# Altium PCB sem_8700.PcbDoc
Units mm, origin at the board's own origin, x right, y up, seen from the top; angles counter-clockwise.
Board outline 86 x 68 mm, 2 copper layers (Top, Bottom); 97 components, 80 nets, 338 pads, 30 vias.
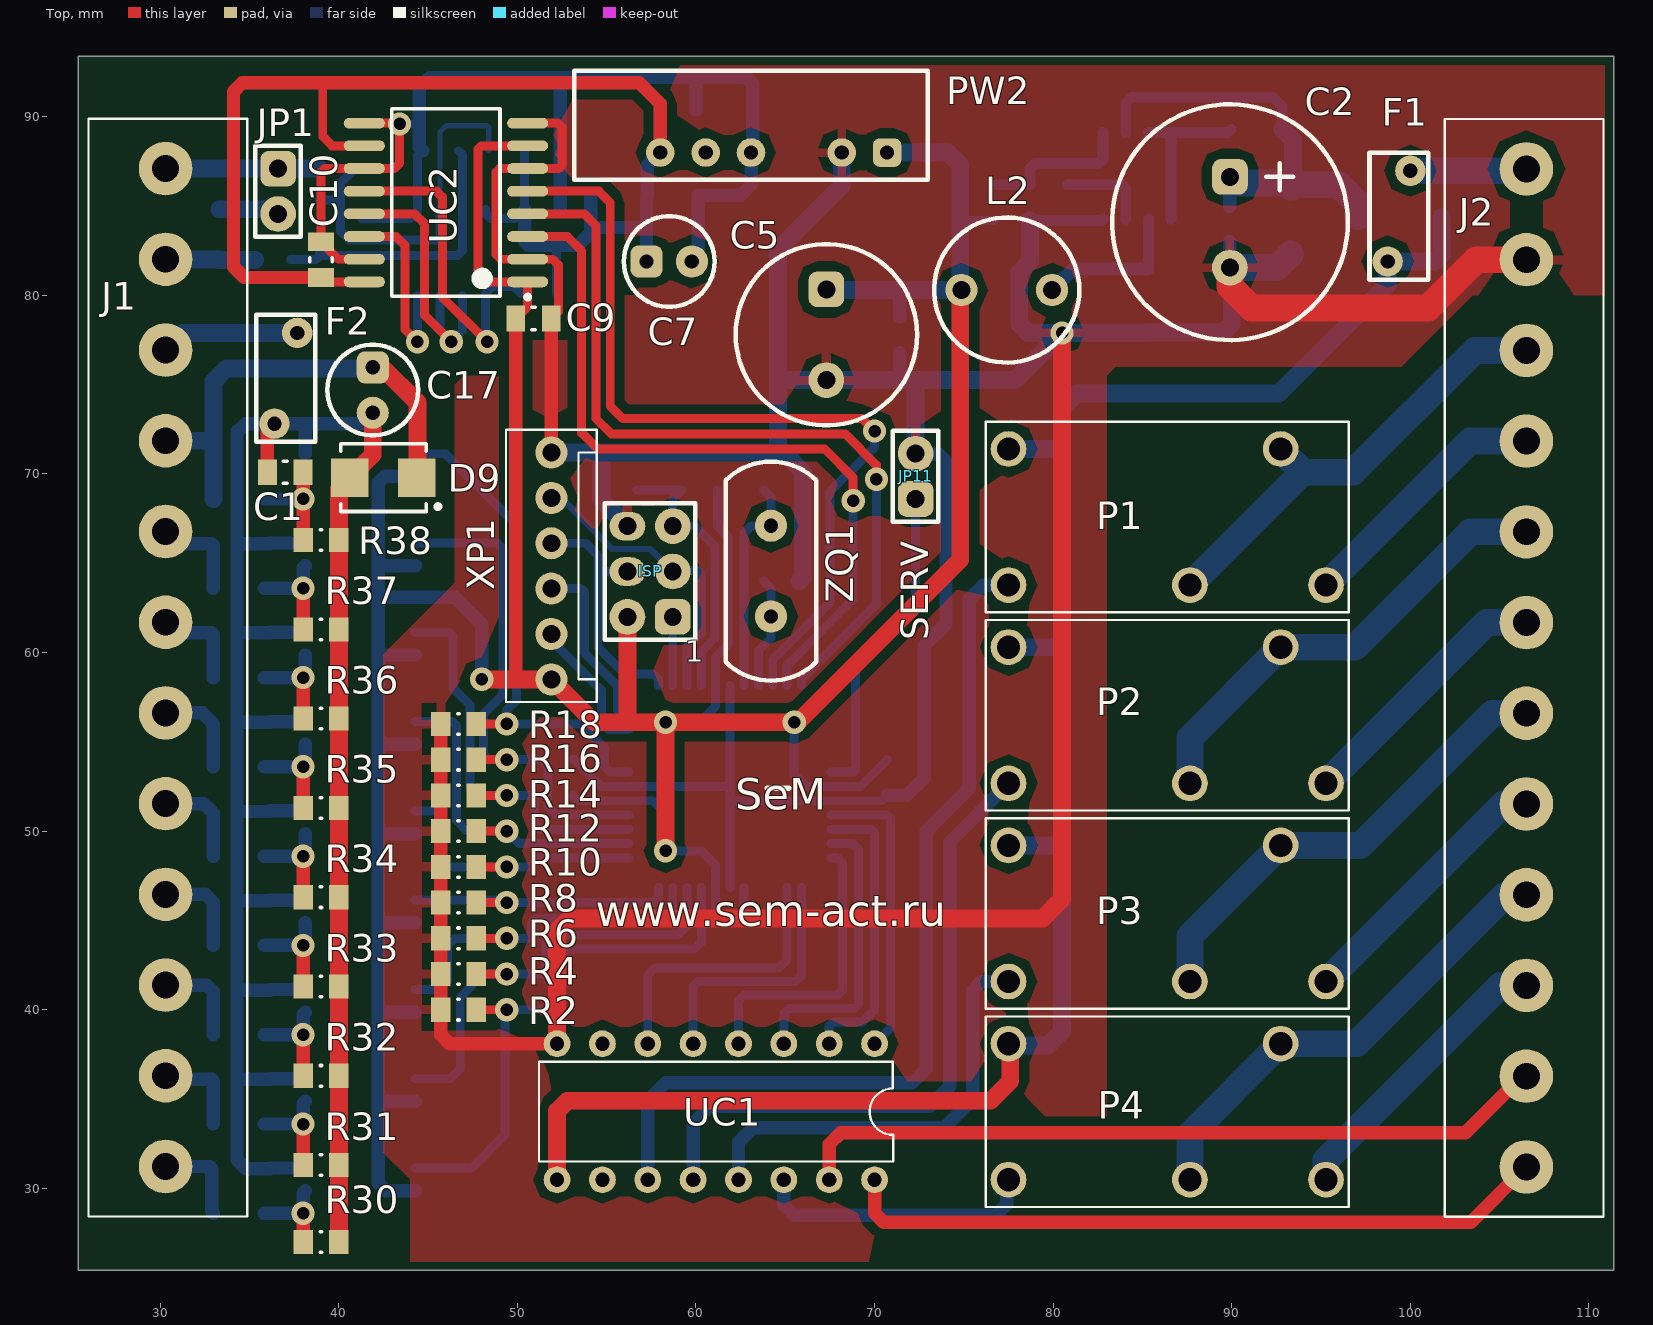
[diagram p0: Top view]
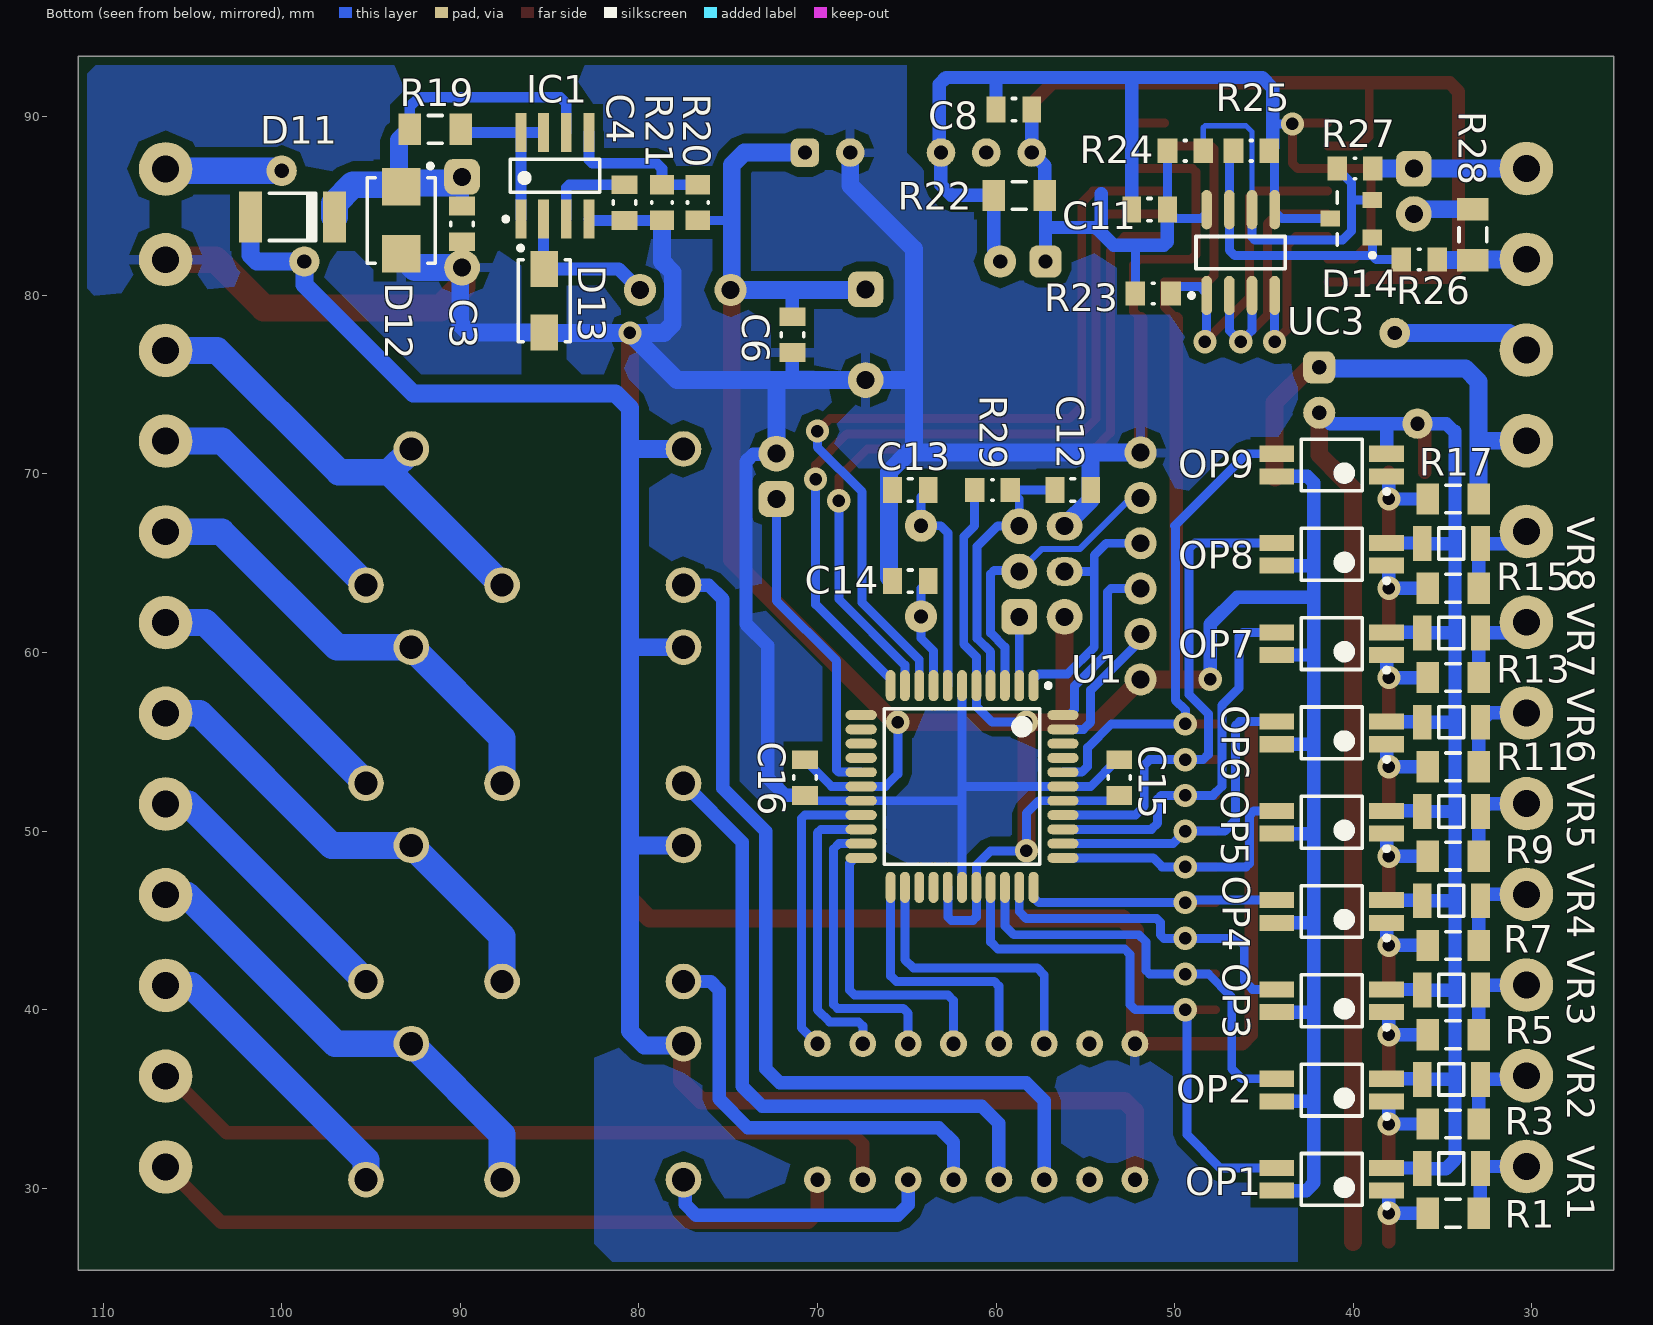
[diagram p1: Bottom view, seen from below]

## Layer stack, top to bottom
Top Solder: solder mask 0.0102, Solder Resist, Dk 3.5
Top: signal copper 0.0356
Dielectric 1: dielectric 0.32, FR-4, Dk 4.8
Bottom: signal copper 0.0356
Bottom Solder: solder mask 0.0102, Solder Resist, Dk 3.5

## Board outline
25.4,25.4 111.4,25.4 111.4,93.4 25.4,93.4

## Design rules (kind name [scope] priority, off if disabled: settings)
Clearance [All] p1: gap=0.3
PlaneConnect [All] p1: planeconnectstyle=Relief reliefexpansion=0.508 reliefentries=4 reliefconductorwidth=0.5 reliefairgap=0.5
PolygonConnect [All] p1: connectstyle=Relief reliefconductorwidth=0.5 reliefentries=4 polygonreliefangle="90 Angle" airgapwidth=0.5
RoutingVias [All] p1: holewidth=0.711 width=1.27 viastyle="Through Hole" minholewidth=0.711 minwidth=1.27 maxholewidth=0.711 maxwidth=1.27
SolderMaskExpansion [All] p1: expansion=0.102
Width [All] p1: maxlimit=1.5 minlimit=0.254 preferedwidth=0.254
28 further rules are at their usual default settings.

## Components (designator, comment, footprint, x,y, rotation, side; value= is the part's Value field where it differs from the comment)
C1 "0.1" CAPC2113X13N_0805 37,70.1 r180 top
C2 "470.0x50V" Cap_pol_13x25 89.9,84.1 r270 top
C3 "0.1" CAPC2113X13N_0805 89.9,84 r270 bottom
C4 "470 pF" CAPC2113X13N_0805 80.8,85.2 r270 bottom
C5 "470.0x35V" Cap_2(10x12.5) 67.3,77.8 r270 top
C6 "0.1" CAPC2113X13N_0805 71.4,77.8 r270 bottom
C7 "22.0x16V" Cap_4(5x10) 58.5,81.9 r0 top
C8 "0.1" CAPC2113X13N_0805 59,90.4 r0 bottom
C9 "0.1" CAPC2113X13N_0805 50.9,78.7 r0 top
C10 "0.1" CAPC2113X13N_0805 39,82 r90 top
C11 "0.1" CAPC2113X13N_0805 51.4,84.8 r180 bottom
C12 "0.1" CAPC2113X13N_0805 55.7,69.1 r180 bottom
C13 "22p" CAPC2113X13N_0805 64.8,69.1 r0 bottom
C14 "22p" CAPC2113X13N_0805 64.8,64 r0 bottom
C15 "0.1" CAPC2113X13N_0805 53.1,53 r90 bottom
C16 "0.1" CAPC2113X13N_0805 70.7,53 r270 bottom
C17 "47.0x35V" Cap_4(5x10) 41.9,74.7 r270 top
D9 "SMDJ36CA" SMB_1 42.5,69.8 r180 top
D11 "SM4007" DIOD_SM1 99.4,84.4 r180 bottom
D12 "SMDJ36CA" SMB_1 93.3,84.2 r270 bottom
D13 "SS18" DIOD_SMA 85.3,79.7 r90 bottom
D14 "ESDA6V1L" SOT23_diod_ESDA 40.1,84.3 r0 bottom
F1 "500mA" Fuse_termo 100,81.9 r90 top
F2 "500mA" Fuse_termo 36.4,77.9 r270 top
IC1 "MC34063" SOIC_SO-8 84.7,86.7 r90 bottom
ISP "ISP" ISP_1 58.7,62 r90 top
J1 "Conn_12x1" conn12_2 30.3,87.1 r0 top
J2 "Conn_12x1" conn12_2 106.5,31.2 r180 top
JP1 "jamper" JP_2_2.5 36.6,87.1 r270 top
JP11 "jamper" JP_2_2.5 72.3,68.6 r90 top
L2 "220mH" Dr_1 77.4,80.3 r180 top
OP1 "TLP281GB" SOIC127_TPL 41.2,30.5 r0 bottom
OP2 "TLP281GB" SOIC127_TPL 41.2,35.5 r0 bottom
OP3 "TLP281GB" SOIC127_TPL 41.2,40.5 r0 bottom
OP4 "TLP281GB" SOIC127_TPL 41.2,45.5 r0 bottom
OP5 "TLP281GB" SOIC127_TPL 41.2,50.5 r0 bottom
OP6 "TLP281GB" SOIC127_TPL 41.2,55.5 r0 bottom
OP7 "TLP281GB" SOIC127_TPL 41.2,60.5 r0 bottom
OP8 "TLP281GB" SOIC127_TPL 41.2,65.5 r0 bottom
OP9 "TLP281GB" SOIC127_TPL 41.2,70.5 r0 bottom
P1 "TRJ" PCB_RELE_TRJ1 77.5,71.4 r0 top
P2 "TRJ" PCB_RELE_TRJ1 77.5,60.3 r0 top
P3 "TRJ" PCB_RELE_TRJ1 77.5,49.2 r0 top
P4 "TRJ" PCB_RELE_TRJ1 77.5,38.1 r0 top
PW2 "TMA_0505" TMA_1W_new 70.7,88 r180 top
R1 "4k7" RES_1206 34.4,28.6 r0 bottom
R2 "4k7" RESC2113X0805N 46.7,40 r180 top
R3 "4k7" RES_1206 34.4,33.6 r0 bottom
R4 "4k7" RESC2113X0805N 46.7,42 r180 top
R5 "4k7" RES_1206 34.4,38.6 r0 bottom
R6 "4k7" RESC2113X0805N 46.7,44 r180 top
R7 "4k7" RES_1206 34.4,43.6 r0 bottom
R8 "4k7" RESC2113X0805N 46.7,46 r180 top
R9 "4k7" RES_1206 34.4,48.6 r0 bottom
R10 "4k7" RESC2113X0805N 46.7,48 r180 top
R11 "4k7" RES_1206 34.4,53.6 r0 bottom
R12 "4k7" RESC2113X0805N 46.7,50 r180 top
R13 "4k7" RES_1206 34.4,58.6 r0 bottom
R14 "4k7" RESC2113X0805N 46.7,52 r180 top
R15 "4k7" RES_1206 34.4,63.6 r0 bottom
R16 "4k7" RESC2113X0805N 46.7,54 r180 top
R17 "4k7" RES_1206 34.4,68.6 r0 bottom
R18 "4k7" RESC2113X0805N 46.7,56 r180 top
R19 "1 Om" RES_1206 91.4,89.3 r0 bottom
R20 "3k6" RESC2113X0805N 76.7,85.2 r270 bottom
R21 "1k2" RESC2113X0805N 78.7,85.2 r90 bottom
R22 "470 Om" RES_1206 58.7,85.6 r0 bottom
R23 "10k" RESC2113X0805N 51.2,80.1 r180 bottom
R24 "4k7" RESC2113X0805N 49.4,88.1 r0 bottom
R25 "4k7" RESC2113X0805N 45.7,88.1 r180 bottom
R26 "10 Om" RESC2113X0805N 36.3,82 r0 bottom
R27 "10 Om" RESC2113X0805N 39.9,87.1 r0 bottom
R28 "120 Om" RES_1206 33.3,83.4 r90 bottom
R29 "47k" RESC2113X0805N 60.2,69.1 r0 bottom
R30 "1k" RESC2113X0805N 39,27 r180 top
R31 "1k" RESC2113X0805N 39,31.3 r180 top
R32 "1k" RESC2113X0805N 39,36.3 r180 top
R33 "1k" RESC2113X0805N 39,41.3 r180 top
R34 "1k" RESC2113X0805N 39,46.3 r180 top
R35 "1k" RESC2113X0805N 39,51.3 r180 top
R36 "1k" RESC2113X0805N 39,56.3 r180 top
R37 "1k" RESC2113X0805N 39,61.3 r180 top
R38 "1k" RESC2113X0805N 39,66.3 r180 top
U1 "ATmega164PA-AU" 44A_N 61.9,52.5 r270 bottom
UC1 "ULN2003A" PDIP16_1 70,38.1 r180 top
UC2 "ADUM1301" SOIC127P1030X265-16N_SOIC_W 46,85.2 r180 top
UC3 "ADM1485" SOIC127P600X175-8N_SOIC_SO8 46.3,82.4 r90 bottom
VR1 "CN1206K25G" var1206 34.5,31.1 r180 bottom
VR2 "CN1206K25G" var1206 34.5,36.1 r180 bottom
VR3 "CN1206K25G" var1206 34.5,41.1 r180 bottom
VR4 "CN1206K25G" var1206 34.5,46.1 r180 bottom
VR5 "CN1206K25G" var1206 34.5,51.1 r180 bottom
VR6 "CN1206K25G" var1206 34.5,56.1 r180 bottom
VR7 "CN1206K25G" var1206 34.5,61.1 r180 bottom
VR8 "CN1206K25G" var1206 34.5,66.1 r180 bottom
XP1 "XP6x1" CONN_WF-6 51.9,71.2 r180 top
ZQ1 "14.7456" ZQ_1 64.2,67.1 r270 top

## Footprints (in the part's own frame and the unit in brackets; to place one, negate y for a bottom-side part, rotate by r counter-clockwise, add the part's x,y. Pads: shape width x height; smd on the part's side, far side on the other; paste and mask are expansions set on the pad)
44A_N [mm] "Thin QFP, 44-Leads, Body 10x10mm, Pitch 0.8mm, IPC Medium Density"
  oval 1.75x0.55 smd: 1(-5.65,4) 2(-5.65,3.2) 3(-5.65,2.4) 4(-5.65,1.6) 5(-5.65,0.8) 6(-5.65,0) 7(-5.65,-0.8) 8(-5.65,-1.6) 9(-5.65,-2.4) 10(-5.65,-3.2) 11(-5.65,-4) 23(5.65,-4) 24(5.65,-3.2) 25(5.65,-2.4) 26(5.65,-1.6) 27(5.65,-0.8) 28(5.65,0) 29(5.65,0.8) 30(5.65,1.6) 31(5.65,2.4) 32(5.65,3.2) 33(5.65,4)
  oval 0.55x1.75 smd: 12(-4,-5.65) 13(-3.2,-5.65) 14(-2.4,-5.65) 15(-1.6,-5.65) 16(-0.8,-5.65) 17(0,-5.65) 18(0.8,-5.65) 19(1.6,-5.65) 20(2.4,-5.65) 21(3.2,-5.65) 22(4,-5.65) 34(4,5.65) 35(3.2,5.65) 36(2.4,5.65) 37(1.6,5.65) 38(0.8,5.65) 39(0,5.65) 40(-0.8,5.65) 41(-1.6,5.65) 42(-2.4,5.65) 43(-3.2,5.65) 44(-4,5.65)
  silkscreen extent -5.77,-4.35 4.35,4.95, body extent -5,-5 5,5, height 1.2
Cap_2(10x12.5) [mm]
  rrect50% 2x2 hole 1: 1(-2.54,0)
  round 2 hole 1: 2(2.54,0)
  silkscreen extent -5.08,-5.08 5.08,5.08, body extent -4.84,-4.84 4.84,4.84, height 12.5
Cap_4(5x10) [mm]
  rrect50% 1.8x1.8 hole 0.8: 1(-1.27,0)
  round 1.8 hole 0.8: 2(1.27,0)
  silkscreen extent -2.54,-2.54 2.54,2.54, body extent -2.31,-2.31 2.31,2.31, height 10
Cap_pol_13x25 [mm]
  rrect50% 2x2 hole 1: 1(-2.54,0)
  round 2 hole 1: 2(2.54,0)
  silkscreen extent -6.6,-6.6 6.6,6.6, body extent -6.61,-6.61 6.61,6.61, height 21
CAPC2113X13N_0805 [mm] "Chip Capacitor, 2-Leads, Body 2.10x1.30mm, IPC Medium Density"
  rect 1.05x1.45 smd: 1(-1,0) 2(1,0)
  silkscreen extent -0.1,-0.63 0.1,0.63, body extent -1.1,-0.7 1.1,0.7, height 1.3
conn12_2 [mm]
  round 3 hole 1.5: 1(0,0) 2(0,-5.08) 3(0,-10.16) 4(0,-15.24) 5(0,-20.32) 6(0,-25.4) 7(0,-30.48) 8(0,-35.56) 9(0,-40.64) 10(0,-45.72) 11(0,-50.8) 12(0,-55.88)
  silkscreen extent -4.32,-58.67 4.57,2.79
CONN_WF-6 [mm]
  round 1.8 hole 1: 1(0,0) 2(0,2.54) 3(0,5.08) 4(0,7.62) 5(0,10.16) 6(0,12.7)
  silkscreen extent -2.54,-1.27 2.54,13.97
DIOD_SM1 [mm]
  rect 1.3x2.85 smd: 1(-2.35,0) 2(2.35,0)
  silkscreen extent -1.3,-1.32 1.3,1.33, body extent -2.6,-1.35 2.6,1.34, height 2.69
DIOD_SMA [mm]
  rect 2x1.55 smd: 1(-1.778,0) 2(1.778,0)
  silkscreen extent -2.3,-1.45 3.07,1.45, body extent -2.3,-1.45 2.3,1.45, height 2.44
Dr_1 [mm]
  round 1.8 hole 1: 1(-2.54,0) 2(2.54,0)
  silkscreen extent -4.06,-4.06 4.06,4.06
Fuse_termo [mm]
  round 1.7 hole 0.8: 1(0,1.27) 2(5.08,0)
  silkscreen extent -1.02,-1.02 6.1,2.29
ISP_1 [mm]
  rrect50% 2x2 hole 1: 1(0,0)
  round 2 hole 1: 2(0,2.54) 3(2.54,0) 5(5.08,0)
  oval 1.6x2 hole 1: 4(2.54,2.54) 6(5.08,2.54)
  silkscreen extent -1.27,-1.27 6.35,3.81
JP_2_2.5 [mm]
  rrect50% 2x2 hole 1: 1(0,0)
  round 2 hole 1: 2(2.54,0)
  silkscreen extent -1.27,-1.27 3.81,1.27
PCB_RELE_TRJ1 [mm]
  round 2 hole 1.3: 1(0,-7.62) 2(10.16,-7.62) 3(17.78,-7.62) 4(15.24,0) 5(0,0)
  silkscreen extent -1.27,-9.14 19.05,1.52
PDIP16_1 [mm]
  round 1.5 hole 0.8: 1(0,0) 2(2.54,0) 3(5.08,0) 4(7.62,0) 5(10.16,0) 6(12.7,0) 7(15.24,0) 8(17.78,0) 9(17.78,7.62) 10(15.24,7.62) 11(12.7,7.62) 12(10.16,7.62) 13(7.62,7.62) 14(5.08,7.62) 15(2.54,7.62) 16(0,7.62)
  silkscreen extent -1.04,1.02 18.8,6.6
RES_1206 [mm] "Chip Resistor, 2-Leads, Body 3.10x1.60mm, IPC Medium Density"
  rect 1.25x1.75 smd: 1(-1.425,0) 2(1.425,0)
  silkscreen extent -0.4,-0.77 0.4,0.77, body extent -1.6,-0.85 1.6,0.85, height 0.55
RESC2113X0805N [mm] "Chip Resistor, 2-Leads, Body 2.10x1.30mm, IPC Medium Density"
  rect 1.1x1.35 smd: 1(-1,0) 2(1,0)
  silkscreen extent -0.05,-0.58 0.05,0.58, body extent -1.1,-0.7 1.1,0.7, height 0.5
SMB_1 [mm]
  rect 2.1x2.15 smd: 1(-1.875,0) 2(1.875,0)
  silkscreen extent -3.18,-1.9 2.4,1.9, body extent -2.4,-1.9 2.4,1.9, height 2.4
SOIC127_TPL [mm] "SOIC, 4-Leads, Body 2.60x4.45mm, Pitch 1.27mm, IPC Medium Density"
  rect 1.95x0.9 smd: 1(-3.075,0.635) 2(-3.075,-0.635) 3(3.075,-0.635) 4(3.075,0.635)
  silkscreen extent -3.2,-1.45 1.7,1.61, body extent -2.35,-1.45 2.35,1.45, height 2.1
SOIC127P600X175-8N_SOIC_SO8 [mm] "SOIC, 8-Leads, Body 4.90x3.90mm, Pitch 1.27mm, IPC Medium Density"
  oval 2.2x0.6 smd: 1(-2.4,1.905) 2(-2.4,0.635) 3(-2.4,-0.635) 4(-2.4,-1.905) 5(2.4,-1.905) 6(2.4,-0.635) 7(2.4,0.635) 8(2.4,1.905)
  silkscreen extent -2.52,-2.5 0.9,2.88, body extent -2,-2.5 2,2.5, height 1.75
SOIC127P1030X265-16N_SOIC_W [mm] "SOIC, 16-Leads, Body 10.30x7.50mm, Pitch 1.27mm, IPC Medium Density"
  oval 2.3x0.6 smd: 1(-4.575,4.445) 2(-4.575,3.175) 3(-4.575,1.905) 4(-4.575,0.635) 5(-4.575,-0.635) 6(-4.575,-1.905) 7(-4.575,-3.175) 8(-4.575,-4.445) 9(4.575,-4.445) 10(4.575,-3.175) 11(4.575,-1.905) 12(4.575,-0.635) 13(4.575,0.635) 14(4.575,1.905) 15(4.575,3.175) 16(4.575,4.445)
  silkscreen extent -4.7,-5.25 3.03,5.42, body extent -3.8,-5.25 3.8,5.25, height 2.65
SOIC_SO-8 [mm]
  rect 2.2x0.6 smd: 1(-2.425,1.905) 2(-2.425,0.635) 3(-2.425,-0.635) 4(-2.425,-1.905) 5(2.425,-1.905) 6(2.425,-0.635) 7(2.425,0.635) 8(2.425,1.905)
  silkscreen extent -2.55,-2.5 0.93,2.88, body extent -2,-2.5 2,2.5, height 1.75
SOT23_diod_ESDA [mm]
  rect 1.1x0.9 smd: 1(-1.175,1.05) 2(-1.175,-1.05) 3(1.175,0)
  silkscreen extent -1.3,-1.5 0.8,2.17, body extent -0.8,-1.52 0.8,1.52, height 1.4
TMA_1W_new [mm]
  rrect50% 1.6x1.6 hole 0.8: 1(0,0)
  round 1.6 hole 0.8: 2(2.54,0) 3(7.62,0) 4(10.16,0) 5(12.7,0)
  silkscreen extent -2.29,-4.57 17.53,1.52, body extent -2.13,-4.59 17.37,1.53, height 10.2
var1206 [mm]
  rect 1.05x1.95 smd: 1(-1.625,0) 2(1.625,0)
  silkscreen extent -0.7,-0.87 0.7,0.87, body extent -1.75,-0.85 1.75,0.85, height 1.69
ZQ_1 [mm]
  round 1.8 hole 0.8: 1(0,0) 2(5.08,0)
  silkscreen extent -3.59,-2.54 8.67,2.54

## Part data
C1 C3 C4 C6 C8 C9 C10 C11 C12 C13 C14 C15 C16: library part cap_1
C2: library part Cap_pol1
C5 C7 C17: library part Cap_pol2
D9 D12: library part Diodes_SMB
D11: library part Diodes_4007
D13: library part Diod_30BQ100
D14: library part Diod_ESDA
F1 F2: library part Fuse_term
IC1: library part MC34063_1
ISP: library part ISP_1
JP1 JP11: library part JP_2x2.5
L2: library part Dr_1
OP1 OP2 OP3 OP4 OP5 OP6 OP7 OP8 OP9: library part opto_TLP
P1 P2 P3 P4: library part Rele_TRJ
PW2: library part TRACO_PW1
R1 R2 R3 R4 R5 R6 R7 R8 R9 R10 R11 R12 R13 R14 R15 R16 R17 R18 R19 R20 R21 R22 R23 R24 R25 R26 R27 R28 R29 R30 R31 R32 R33 R34 R35 R36 R37 R38: library part rez_1
U1: "8-bit AVR Microcontroller, 16KB Flash, 512 Bytes EEPROM, 1KB SRAM, 44-pin TQFP, Industrial Grade (-40°C to 85°C)"
UC3: library part ADM485
VR1 VR2 VR3 VR4 VR5 VR6 VR7 VR8: library part var_smd1
XP1: library part Connect6_1
ZQ1: library part ZQ_1

## Via types
v1: diameter 1.3, hole 0.7, Top to Bottom, tented both sides, 30 vias

## Nets (pads, with @x,y where several pads share a name; then routed paths per layer and width w, separated by ;. In a path a pad name is that pad's centre, name@x,y a point inside that pad or via, vN(x,y) a via of type N, cw(c..) or ccw(c..) an arc to the next point about the centre after c; other vN are vias at no path point)
+5V: C5.1 C6.1 C9.1 C15.1 C16.1 ISP.2 L2.2 OP1.4 OP2.4 OP3.4 OP4.4 OP5.4 OP6.4 OP7.4 OP8.4 OP9.4 PW2.1 R20.2 R29.2 U1.5 U1.17 U1.27 U1.29 U1.38 UC2.1 UC2.7 XP1.6 | length 227.6
  Top w0.5: 49.9,58.6 50,58.5 ; C9.1 50.575,79.375 UC2.1 48.145,80.755 47.8,81.1 47.8,88.2 47.975,88.375 UC2.7
  Top w0.75: 49.9,58.6 C9.1
  Top w1: v1(48,58.5) 50,58.5 XP1.6 54.3,56.1 56.2,56.1 ; ISP.2 56.16,56.14 56.2,56.1 ; v1(58.3,48.9) v1(58.3,56.1) ; L2.2 74.8,80.24 74.8,65.2 65.7,56.1 v1(65.5,56.1) v1(58.3,56.1) ; 56.2,56.1 v1(58.3,56.1)
  Bottom w0.5: C15.1 53.4,51.7 U1.38 57.6,51.7 58.3,51 v1(58.3,48.9) 60.3,48.9 61.1,48.1 U1.29 61.1,45.2 61.3,45 62.5,45 62.7,45.2 U1.27 U1.27@62.721,46.829 ; v1(58.3,56.1) 60.2,56.1 61.1,57 U1.5 61.1,59.767 61.808,60.475 61.808,66.492 61.2,67.1 R29.2 ; v1(65.5,56.1) 65.5,53.2 66.2,52.5 U1.17 69.2,52.5 C16.1 ; 74.8,84.2 R20.2
  Bottom w0.75: OP1.4 42.635,29.865 42.2,30.3 42.2,34.9 ; OP2.4 42.235,34.865 42.2,34.9 ; OP3.4 42.335,39.865 42.2,40 ; OP4.4 42.265,44.865 42.2,44.8 ; OP5.4 42.265,49.865 42.2,49.8 ; OP6.4 42.265,54.865 42.2,54.8 ; OP7.4 42.265,59.865 42.2,59.8 ; OP8.4 42.265,64.865 42.2,64.8 ; OP9.4 42.565,69.865 42.2,69.5 42.2,64.8 ; v1(48,58.5) 48,61.6 46.5,63.1 42.2,63.1 ; C6.1 71.4,80.3 ; 42.2,34.9 42.2,40 ; 42.2,40 42.2,44.8 ; 42.2,44.8 42.2,49.8 ; 42.2,49.8 42.2,54.8 ; 42.2,54.8 42.2,59.8 ; 42.2,59.8 42.2,63.1 ; 42.2,63.1 42.2,64.8
  Bottom w1: C5.1 67.34,80.3 71.4,80.3 L2.2 74.8,80.36 74.8,84.2 74.8,87.3 74.1,88 PW2.1
+5V_I: C7.1 C8.1 C10.1 C11.2 PW2.5 R22.1 R23.1 R24.2 UC2.10 UC2.16 UC3.8 | length 79.3
  Top w0.5: C10.1 39.245,80.755 UC2.16 ; 39.2,91.9 39.1,91.8 39.1,88.9 39.625,88.375 UC2.10
  Top w0.75: C10.1 34.7,81 34.1,81.6 34.1,91.4 34.6,91.9 39.2,91.9 56.825,91.9 58,90.725 PW2.5
  Bottom w0.5: UC3.8 48.205,84.595 48.5,84.3 49.9,84.3 C11.2 R24.2 ; R23.1 52.2,82.7 52.3,82.8
  Bottom w0.75: C11.2 50.4,83 50.6,82.8 52.3,82.8 53.4,82.8 54.1,83.5 ; 54.1,85.7 54.1,83.5 ; C7.1 57.23,83.8 ; C8.1 PW2.5 57.275,87.275 R22.1 57.23,85.555 57.23,83.8 ; 54.1,83.5 54.4,83.8 57.23,83.8
+24V: D11.1 F1.1 P1.5 P2.5 P3.5 P4.5 UC1.9 | length 107.1
  Top w1: UC1.9 52.22,34.32 52.8,34.9 76.5,34.9 77.6,36 77.6,38 P4.5
  Bottom w1: P4.5 77.6,38 79.7,38 80.5,38.8 80.5,49.3 ; P3.5 80.4,49.2 80.5,49.3 ; P2.5 80.5,60.3 ; P1.5 80.5,71.4 ; D11.1 101.75,82.25 101.4,81.9 F1.1 98.73,80.6 92.63,74.5 81.3,74.5 80.5,73.7 80.5,71.4 ; 80.5,49.3 80.5,60.3 ; 80.5,60.3 80.5,71.4
+24V_EX: C17.1 D9.1 J1.4 R17.1 | length 25.7
  Top w1: C17.1 42.43,75.97 44.4,74 44.4,69.825 D9.1
  Bottom w0.75: J1.4 J1.4@30.36,71.8
  Bottom w1: J1.4 32.947,71.86 32.975,71.888 ; R17.1 32.975,71.888 ; C17.1@41.5,75.97 41.43,75.9 33.7,75.9 32.975,75.175 32.975,71.888
A: J1.1 JP1.1 R27.1 | length 8.6
  Bottom w1: J1.1 JP1.1 R27.1
B: J1.2 R26.1 R28.1 | length 5
  Bottom w1: J1.2 33.255,82.02 R28.1 35.275,81.975 R26.1
DI1: OP8.3 R16.1 U1.37 | length 29.6
  Top w0.5: R16.1 v1(49.4,54)
  Bottom w0.5: OP8.3 48.865,66.135 49.2,65.8 49.2,57.654 48.108,56.562 48.108,54.3 48.408,54 v1(49.4,54) 51.4,54 51.7,53.7 51.7,51.4 52.2,50.9 U1.37
DI2: OP7.3 R14.1 U1.36 | length 23.4
  Top w0.5: R14.1 v1(49.4,52)
  Bottom w0.5: OP7.3 46.165,61.135 46.4,60.9 46.4,58 47.354,57.046 47.354,52.5 47.854,52 v1(49.4,52) 50.746,52 50.946,51.8 50.946,50.454 51.3,50.1 U1.36
DI3: OP6.3 R12.1 U1.35 | length 19.6
  Top w0.5: R12.1 v1(49.4,50)
  Bottom w0.5: OP6.3 46.365,56.135 46.6,55.9 46.6,50.6 47.2,50 v1(49.4,50) 50.1,49.3 U1.35
DI4: OP5.3 R10.1 U1.34 | length 16.8
  Top w0.5: R10.1 v1(49.4,48)
  Bottom w0.5: OP5.3 45.565,51.135 45.8,50.9 45.8,48.2 46,48 v1(49.4,48) 50.7,48 51.2,48.5 U1.34
DI5: OP4.3 R8.1 U1.33 | length 16.1
  Top w0.5: R8.1 v1(49.4,46)
  Bottom w0.5: OP4.3 49.265,46.135 v1(49.4,46) 57.6,46 57.9,46.3 U1.33
DI6: OP3.3 R6.1 U1.32 | length 20.9
  Top w0.5: R6.1 v1(49.4,44)
  Bottom w0.5: OP3.3 45.635,41.135 46.1,41.6 46.1,43.6 46.5,44 v1(49.4,44) 50.6,44 50.8,44.2 50.8,44.9 51,45.1 58.3,45.1 58.7,45.5 U1.32
DI7: OP2.3 R4.1 U1.31 | length 25.9
  Top w0.5: R4.1 v1(49.4,42)
  Bottom w0.5: OP2.3 46.235,36.135 46.8,36.7 46.8,40.7 48.1,42 v1(49.4,42) 51.4,42 51.6,42.2 51.6,43.8 52,44.2 59,44.2 59.5,44.7 U1.31
DI8: OP1.3 R2.1 U1.30 | length 31.7
  Top w0.5: R2.1 v1(49.4,40)
  Bottom w0.5: OP1.3 47.435,31.135 49.3,33 49.3,39.9 v1(49.4,40) 52.2,40 52.5,40.3 52.5,43.1 52.8,43.4 59.9,43.4 60.3,43.8 U1.30
DIN_1: J1.5 R15.1 VR8.2 | length 5.4
  Bottom w0.75: J1.5 30.98,66.1 VR8.2 32.975,66 R15.1
DIN_2: J1.6 R13.1 VR7.2 | length 5.4
  Bottom w0.75: J1.6 30.9,61.1 VR7.2 32.975,61 R13.1
DIN_3: J1.7 R11.1 VR6.2 | length 5.3
  Bottom w0.75: J1.7 32.355,56.62 VR6.2 32.975,56 R11.1
DIN_4: J1.8 R9.1 VR5.2 | length 5.3
  Bottom w0.75: J1.8 32.435,51.54 VR5.2 32.975,51 R9.1
DIN_5: J1.9 R7.1 VR4.2 | length 5.3
  Bottom w0.75: J1.9 32.515,46.46 VR4.2 32.975,46 R7.1
DIN_6: J1.10 R5.1 VR3.2 | length 5.2
  Bottom w0.75: J1.10 32.595,41.38 VR3.2 32.975,41 R5.1
DIN_7: J1.11 R3.1 VR2.2 | length 5.2
  Bottom w0.75: J1.11 30.5,36.1 VR2.2 32.975,36 R3.1
DIN_8: J1.12 R1.1 VR1.2 | length 5.2
  Bottom w0.75: J1.12 32.755,31.22 VR1.2 32.875,28.7 R1.1
DO1: U1.24 UC1.6 | length 16
  Bottom w0.5: UC1.6 57.3,41.938 57.7,42.338 64.63,42.338 65.1,42.808 U1.24
DO2: U1.23 UC1.5 | length 14.5
  Bottom w0.5: UC1.5 59.84,41.324 60.1,41.584 65.584,41.584 65.9,41.9 U1.23
DO3: U1.22 UC1.4 | length 16.3
  Bottom w0.5: UC1.4 62.38,40.51 62.7,40.83 67.93,40.83 68.2,41.1 68.2,48.2 67.9,48.5 U1.22
DO4: U1.21 UC1.3 | length 16.5
  Bottom w0.5: UC1.3 64.92,39.796 65.2,40.076 68.876,40.076 69.1,40.3 69.1,49 68.8,49.3 U1.21
DO5: U1.20 UC1.2 | length 16.3
  Bottom w0.5: UC1.2 67.46,39.082 67.7,39.322 69.322,39.322 70,40 70,49.9 69.8,50.1 U1.20
DO6: U1.19 UC1.1 | length 16.4
  Bottom w0.5: U1.19 70.7,50.9 70.9,50.7 70.9,39 UC1.1
GND: C2.2 C3.2 C4.2 C5.2 C6.2 C9.2 C12.2 C13.2 C14.2 C15.2 C16.2 D12.2 D13.1 IC1.4 ISP.6 J2.11 JP11.2 PW2.2 R2.2 R4.2 R6.2 R8.2 R10.2 R12.2 R14.2 R16.2 R18.2 R21.1 U1.6 U1.18 U1.28 U1.39 UC1.8 UC2.2 UC2.6 UC2.8 XP1.1 | length 287.1
  Top w0.5: UC2.8 52.255,89.645 52.5,89.4 52.5,87.3 52.305,87.105 UC2.6 49.005,87.105 48.8,86.9 48.8,82.3 49.075,82.025 UC2.2 51.975,82.025 52.3,81.7 52.3,79.1 C9.2
  Top w0.75: R18.2 R16.2 R14.2 R12.2 R10.2 R8.2 R6.2 R4.2 R2.2 45.7,38.6 46.2,38.1 UC1.8 ; XP1.1 C9.2
  Top w1: UC1.8 52.22,44.42 52.9,45.1 79.4,45.1 80.5,46.2 v1(80.5,77.9)
  Top w1.5: C2.2 89.9,80.5 91.1,79.3 101,79.3 103.7,82 J2.11
  Bottom w0.5: C15.2 53.2,54 54.7,52.5 U1.39 61.9,52.5 ; U1.28 61.9,51.7 ; U1.6 61.9,52.5 ; C16.2 70.4,51.7 U1.18 61.9,51.7 ; 61.9,51.7 61.9,52.5
  Bottom w0.6: R21.1 C4.2 82.72,84.2 IC1.4
  Bottom w0.75: C16.2 71.8,52 72.779,52.979 72.779,60.379 74,61.6 74,70.7 73.6,71.1 72.34,71.1 JP11.2 ; 71.4,75.26 C6.2 ; C2.2 C3.2
  Bottom w1: XP1.1 54.8,71.2 ; ISP.6 54.7,68.54 C12.2 54.7,71.1 54.8,71.2 ; C14.2 66,64.2 66,70.1 64.9,71.2 ; PW2.2 68.16,86.16 64.6,82.6 64.6,75.2 ; JP11.2 72.3,75.26 ; R21.1 78.7,81.9 78.1,81.3 78.1,78.4 78.6,77.9 v1(80.5,77.9) ; C2.2 90,81.46 90,78.4 89.522,77.922 D13.1 85.278,77.9 v1(80.5,77.9) ; 54.8,71.2 64.9,71.2 ; 64.6,75.2 64.6,71.5 64.9,71.2 ; 64.6,75.2 64.66,75.26 C5.2 71.4,75.26 72.3,75.26 ; 72.3,75.26 77.86,75.26 v1(80.5,77.9)
  Bottom w1.5: C2.2 92.535,81.56 D12.2
GND_EX: C1.2 C17.2 D9.2 F2.2 OP1.2 OP2.2 OP3.2 OP4.2 OP5.2 OP6.2 OP7.2 OP8.2 OP9.2 R30.1 R31.1 R32.1 R33.1 R34.1 R35.1 R36.1 R37.1 R38.1 VR1.1 VR2.1 VR3.1 VR4.1 VR5.1 VR6.1 VR7.1 VR8.1 | length 131.7
  Top w0.75: C1.2 36,72.3 F2.2@36.5,72.8
  Top w1: R30.1 R31.1 R32.1 R33.1 R34.1 R35.1 R36.1 R37.1 R38.1 40,69.175 D9.2 41.9,71.075 C17.2
  Bottom w0.75: OP1.2 36.16,31.135 VR1.1 34.8,31.1 34.3,31.6 34.3,36.1 ; OP2.2 36.16,36.135 VR2.1 34.3,36.1 ; OP3.2 36.16,41.135 VR3.1 34.3,41.1 ; OP4.2 36.16,46.135 VR4.1 34.4,46.1 34.3,46 ; OP5.2 36.16,51.135 VR5.1 34.3,51.1 ; OP6.2 36.16,56.135 VR6.1 34.3,56.1 ; OP7.2 36.16,61.135 VR7.1 34.3,61.1 ; OP8.2 36.16,66.135 VR8.1 34.3,66.1 ; OP9.2 38.125,72.675 37.98,72.82 ; C17.2 41.29,72.82 37.98,72.82 ; 34.3,36.1 34.3,41.1 ; 34.3,41.1 34.3,46 ; 34.3,46 34.3,51.1 ; 34.3,51.1 34.3,56.1 ; 34.3,56.1 34.3,61.1 ; 34.3,61.1 34.3,66.1 ; 34.3,66.1 34.3,72.4 34.36,72.4 34.78,72.82 F2.2 37.98,72.82
GND_I: C7.2 C8.2 C10.2 C11.1 D14.3 PW2.3 R22.2 R25.2 UC2.9 UC2.11 UC2.15 UC3.5 | length 68.2
  Top w0.5: UC2.15 39.975,82.025 C10.2 39,86.9 39.205,87.105 UC2.11 41.43,87.1 43.1,87.1 43.4,87.4 43.4,89.4 43.155,89.645 UC2.9
  Bottom w0.5: D14.3 44,84.3 44.395,84.695 UC3.5 44.395,87.795 R25.2 ; v1(43.4,89.6) 44.5,89.6 44.6,89.5
  Bottom w0.75: R25.2 44.5,88.3 44.5,89.6 44.5,91.6 45.1,92.2 52.4,92.2 ; C11.1 52.4,92.2 ; C7.2 60.125,82.255 R22.2 62.5,85.6 63.1,86.2 63.1,87.98 PW2.3 ; C8.2 60,92.2 ; PW2.3@62.8,88 63.18,88.38 63.18,91.82 62.8,92.2 60,92.2 ; 52.4,92.2 60,92.2
LD: U1.43 XP1.5 | length 7.8
  Bottom w0.5: XP1.5 51.9,60.7 54.7,57.9 54.7,56.1 55.1,55.7 U1.43
MOSI: ISP.4 U1.1 XP1.3 | length 14.2
  Bottom w0.5: XP1.3 53.826,66.12 54.5,65.446 54.5,64.523 ; ISP.4 54.517,64.54 54.5,64.523 ; U1.1 57.9,58.5 57.6,58.8 56,58.8 54.5,60.3 54.5,63.6 54.5,64.523
MOSO: ISP.1 U1.2 | length 3.9
  Bottom w0.5: U1.2 ISP.1
NetC1_1: C1.1 OP9.1 R17.2 R38.2 | length 7.3
  Top w0.75: R38.2 v1(38,68.6) C1.1
  Bottom w0.75: R17.2 v1(38,68.6) 38,69.74 OP9.1
NetC2_1: C2.1 C3.1 D11.2 D12.1 IC1.6 R19.2 | length 25.9
  Bottom w0.6: IC1.6 84.065,90.765 84.4,91.1 92.3,91.1 92.825,90.575 R19.2 ; D11.2@96.9,84.55 D11.2
  Bottom w0.75: C3.1 C2.1
  Bottom w1: R19.2 93.425,88.7 D12.1@93.425,86.2
  Bottom w1.5: C2.1 90.24,86.3 93.075,86.3 D12.1 93.425,86.2 96,86.2 97.05,85.15 D11.2
NetC4_1: C4.1 IC1.3 | length 5.1
  Bottom w0.6: C4.1 83.9,86.2 84.065,86.035 IC1.3
NetC13_1: C13.1 U1.7 ZQ1.1 | length 12.4
  Bottom w0.5: U1.7 62.7,66.7 63.1,67.1 ZQ1.1 64.2,68.7 C13.1
NetC14_1: C14.1 U1.8 ZQ1.2 | length 6.3
  Bottom w0.5: U1.8 63.5,60.1 64.2,60.8 ZQ1.2 64.2,63.6 C14.1
NetD13_2: D13.2 IC1.2 L2.1 | length 8.7
  Bottom w0.6: D13.2 85.335,81.513 IC1.2
  Bottom w0.75: L2.1 81.118,81.478 D13.2
NetD14_1: D14.1 R25.1 R26.2 UC3.7 | length 16.5
  Bottom w0.5: R26.2 38.7,82 38.925,82.225 ; D14.1 38.925,82.225 ; R25.1 46.935,87.865 UC3.7 46.935,82.535 46.625,82.225 38.925,82.225
NetD14_2: D14.2 R24.1 R27.2 UC3.6 | length 21.1
  Bottom w0.3: UC3.6 45.665,89.165 46,89.5 48.3,89.5 48.4,89.4 R24.1@48.4,88.3 ; R24.1@48.3,88.4 R24.1@48.4,88.3 ; R24.1 R24.1@48.4,88.3
  Bottom w0.5: D14.2 40.05,85.35 40.1,85.3 ; R27.2 40.1,86.3 40.1,85.3 ; UC3.6 45.665,83.265 45.5,83.1 40.6,83.1 40.1,83.6 40.1,85.3
NetF2_1: F2.1 J1.3 | length 7.8
  Bottom w1: J1.3 31.26,77.9 F2.1
NetIC1_1: IC1.1 IC1.7 IC1.8 R19.1 | length 9.6
  Bottom w0.6: IC1.7 IC1.8 ; IC1.1 IC1.8 ; R19.1 89.8,89.125 IC1.8
NetIC1_5: IC1.5 R20.1 R21.2 | length 8.7
  Bottom w0.6: R20.1 R21.2 78.7,87.1 79,87.4 82.6,87.4 82.795,87.595 IC1.5
NetJ2_1: J2.1 UC1.16 | length 39.9
  Top w0.75: UC1.16 70,28.6 70.5,28.1 103.4,28.1 J2.1
NetJ2_2: J2.2 UC1.15 | length 42.7
  Top w0.75: UC1.15 67.46,32.46 68.1,33.1 103.08,33.1 106.38,36.4 J2.2
NetJ2_3: J2.3 P4.3 | length 16.4
  Bottom w1.5: P4.3 95.28,31.58 105.06,41.36 J2.3
NetJ2_4: J2.4 P4.2 P4.4 | length 26.9
  Bottom w1.5: P4.2 87.66,33.02 P4.4 97,38.1 105.34,46.44 J2.4
NetJ2_5: J2.5 P3.3 | length 15.3
  Bottom w1.5: P3.3 105.22,51.52 J2.5
NetJ2_6: J2.6 P3.2 P3.4 | length 26.5
  Bottom w1.5: P3.2 87.66,44.12 P3.4 97.2,49.2 104.6,56.6 J2.6
NetJ2_7: J2.7 P2.3 | length 14.9
  Bottom w1.5: P2.3 104.28,61.68 J2.7
NetJ2_8: J2.8 P2.2 P2.4 | length 26.2
  Bottom w1.5: P2.2 87.66,55.22 P2.4 96.9,60.3 103.36,66.76 J2.8
NetJ2_9: J2.9 P1.3 | length 14.6
  Bottom w1.5: P1.3 103.34,71.84 J2.9
NetJ2_10: J2.10 P1.2 P1.4 | length 26.1
  Bottom w1.5: P1.2 93.98,70.1 ; P1.4 92.74,71.34 93.98,70.1 ; J2.10 103.62,76.92 96.8,70.1 93.98,70.1
NetJP1_2: JP1.2 R28.2 | length 3.4
  Bottom w1: R28.2 36.335,84.825 JP1.2
NetJP11_1: JP11.1 U1.16 | length 18
  Bottom w0.5: U1.16 68.8,53.3 68.929,53.429 68.929,59.529 72.3,62.9 JP11.1
NetOP1_1: OP1.1 R1.2 R30.2 | length 5.1
  Top w0.75: R30.2 v1(38,28.6)
  Bottom w0.75: R1.2 v1(38,28.6) 38,29.74 OP1.1
NetOP2_1: OP2.1 R3.2 R31.2 | length 5.8
  Top w0.75: R31.2 v1(38,33.6)
  Bottom w0.75: R3.2 v1(38,33.6) 38,34.74 OP2.1
NetOP3_1: OP3.1 R5.2 R32.2 | length 5.8
  Top w0.75: R32.2 v1(38,38.6)
  Bottom w0.75: R5.2 v1(38,38.6) 38,39.74 OP3.1
NetOP4_1: OP4.1 R7.2 R33.2 | length 5.8
  Top w0.75: R33.2 v1(38,43.6)
  Bottom w0.75: R7.2 v1(38,43.6) 38.125,43.725 OP4.1
NetOP5_1: OP5.1 R9.2 R34.2 | length 5.8
  Top w0.75: R34.2 v1(38,48.6)
  Bottom w0.75: R9.2 v1(38,48.6) 38.125,48.725 OP5.1
NetOP6_1: OP6.1 R11.2 R35.2 | length 5.8
  Top w0.75: R35.2 v1(38,53.6)
  Bottom w0.75: R11.2 v1(38,53.6) 38.125,53.725 OP6.1
NetOP7_1: OP7.1 R13.2 R36.2 | length 5.8
  Top w0.75: R36.2 v1(38,58.6)
  Bottom w0.75: R13.2 v1(38,58.6) 38.125,58.725 OP7.1
NetOP8_1: OP8.1 R15.2 R37.2 | length 5.8
  Top w0.75: R37.2 v1(38,63.6)
  Bottom w0.75: R15.2 v1(38,63.6) 38,64.74 OP8.1
NetP1_1: P1.1 UC1.11 | length 50.6
  Bottom w0.75: UC1.11 57.3,34.9 58.3,35.9 72.1,35.9 72.9,36.7 72.9,50 75.3,52.4 75.3,63 76.08,63.78 P1.1
NetP2_1: P2.1 UC1.12 | length 36.7
  Bottom w0.75: UC1.12 59.84,33.64 60.8,34.6 73.1,34.6 74.2,35.7 74.2,49.38 P2.1
NetP3_1: P3.1 UC1.13 | length 24.5
  Bottom w0.75: UC1.13 62.38,32.58 63.2,33.4 73.9,33.4 75.5,35 75.5,41.1 75.98,41.58 P3.1
NetP4_1: P4.1 UC1.14 | length 15.8
  Bottom w0.75: UC1.14 64.92,29.08 65.5,28.5 76.8,28.5 77.4,29.1 77.4,30.38 P4.1
NetR23_2: R23.2 UC2.12 UC3.1 | length 18.7
  Top w0.5: UC2.12 45.465,85.835 45.8,85.5 45.8,79.9 v1(48.3,77.4)
  Bottom w0.5: v1(48.3,77.4) 48.205,77.495 UC3.1 48.205,80.105 48.6,80.5 49.8,80.5 R23.2
NetUC2_13: UC2.13 UC3.2 UC3.3 | length 16.6
  Top w0.5: UC2.13 44.235,84.565 44.8,84 44.8,78.9 v1(46.3,77.4)
  Bottom w0.5: UC3.3 45.665,78.035 v1(46.3,77.4) 46.935,78.035 UC3.2
NetUC2_14: UC2.14 UC3.4 | length 10.8
  Top w0.5: UC2.14 43.205,83.295 43.7,82.8 43.7,78.1 v1(44.4,77.4)
  Bottom w0.5: UC3.4 44.395,77.405 v1(44.4,77.4)
RST: C12.1 ISP.5 R29.1 U1.4 | length 15.7
  Bottom w0.5: C12.1 R29.1 58.7,68.6 ISP.5 59.88,67.08 59.9,67.1 61.054,65.946 61.054,60.788 60.3,60.034 U1.4
RX: U1.9 UC2.5 | length 48.3
  Top w0.5: UC2.5 54.565,85.835 55.2,85.2 55.2,73.8 55.9,73.1 69.3,73.1 v1(70,72.4)
  Bottom w0.5: U1.9 64.3,59.6 67.5,62.8 67.5,69 70,71.5 v1(70,72.4)
SCK: ISP.3 U1.3 XP1.2 | length 16.8
  Bottom w0.35: XP1.2 52.44,68.66 55.3,65.8 57.44,65.8 ISP.3
  Bottom w0.5: ISP.3 58.76,64.6 60.1,64.6 60.3,64.4 60.3,61.1 59.5,60.3 U1.3
SS: U1.44 XP1.4 | length 10.1
  Bottom w0.5: XP1.4 53.566,63.58 53.746,63.4 53.746,59.988 55.6,58.134 55.6,56.8 55.9,56.5 U1.44
TX: U1.10 UC2.3 | length 43
  Top w0.5: UC2.3 52.805,83.295 53.6,82.5 53.6,72.3 54.5,71.4 67.2,71.4 68.8,69.8 v1(68.8,68.5)
  Bottom w0.5: U1.10 65.1,59.3 68.8,63 v1(68.8,68.5)
TXE: U1.11 UC2.4 | length 45.8
  Top w0.5: UC2.4 53.735,84.565 54.4,83.9 54.4,73.1 55.254,72.246 68.354,72.246 70.1,70.5 v1(70.1,69.7)
  Bottom w0.5: U1.11 65.9,58.5 70.1,62.7 70.1,69.6 v1@70,69.7
UIN: OP9.3 R18.1 U1.40 | length 29
  Top w0.5: R18.1 v1(49.4,56)
  Bottom w0.5: OP9.3 45.965,71.135 50,67.1 49.954,67.054 49.954,57.342 49.4,56.788 v1(49.4,56) 53.546,56 54.871,54.675 54.871,53.629 55.2,53.3 U1.40
UPP: F1.2 J2.12 | length 6.5
  Bottom w1.5: F1.2 106.4,86.98 J2.12
pads on no net: PW2.4 U1.12 U1.13 U1.14 U1.15 U1.25 U1.26 U1.41 U1.42 UC1.7 UC1.10

## Polygon pours and split planes (outlines as drawn)
GND on Top "Bottom-No Net" (solid, remove dead copper, pour order 2): 65.5,92.9 65.5,89.5 62,86 62,80.4 61.6,80 56,80 56,71 70.5,71 82.5,71 83,71.5 83,75.5 83.5,76 99.5,76 103.5,80 110.9,80 110.9,92.9
GND on Top "Bottom-No Net" (solid, remove dead copper, pour order 6): 53,72.6 53,79.4 52.4,80 50,80 49.3,79.3 49.3,76 48.8,75.5 48.2,75.5 47,75.5 46.5,75 46.5,74.9 46.5,63.9 42.5,59.9 42.5,59.5 42.5,32 44,30.5 44,25.9 83,25.9 83,72.6
GND on Top "Bottom-No Net" (solid, remove dead copper, pour order 8): 48,92.9 48,75 73.7,75 73.7,92.9
GND on Bottom "Bottom-No Net" (solid, remove dead copper, pour order 12): 65,92.9 65,88 64,87 63.5,87 43.9,87 43.1,86.2 43.1,25.9 81.5,25.9 82.5,26.9 82.5,74.9 82.6,74.8 92.5,74.8 97.6,79.9 110.4,79.9 110.9,80.4 110.9,92.4 110.4,92.9

## Silkscreen, mask and mechanical layers (free items; w line width, h text height)
Top Overlay:
  lines w0.3: 64,52.4 65.2,52.4
  text "SERV" at 73,60.7 h1.52 r90
  text "1" at 59.4,59.1 h2
  text "SeM" at 62.2,50.6 h3
  text "www.sem-act.ru" at 54.4,44.1 h3
Board:
  the board outline again, w0.127